# EAGLE board esquema_gps_usb_v2 (EAGLE 5.11)
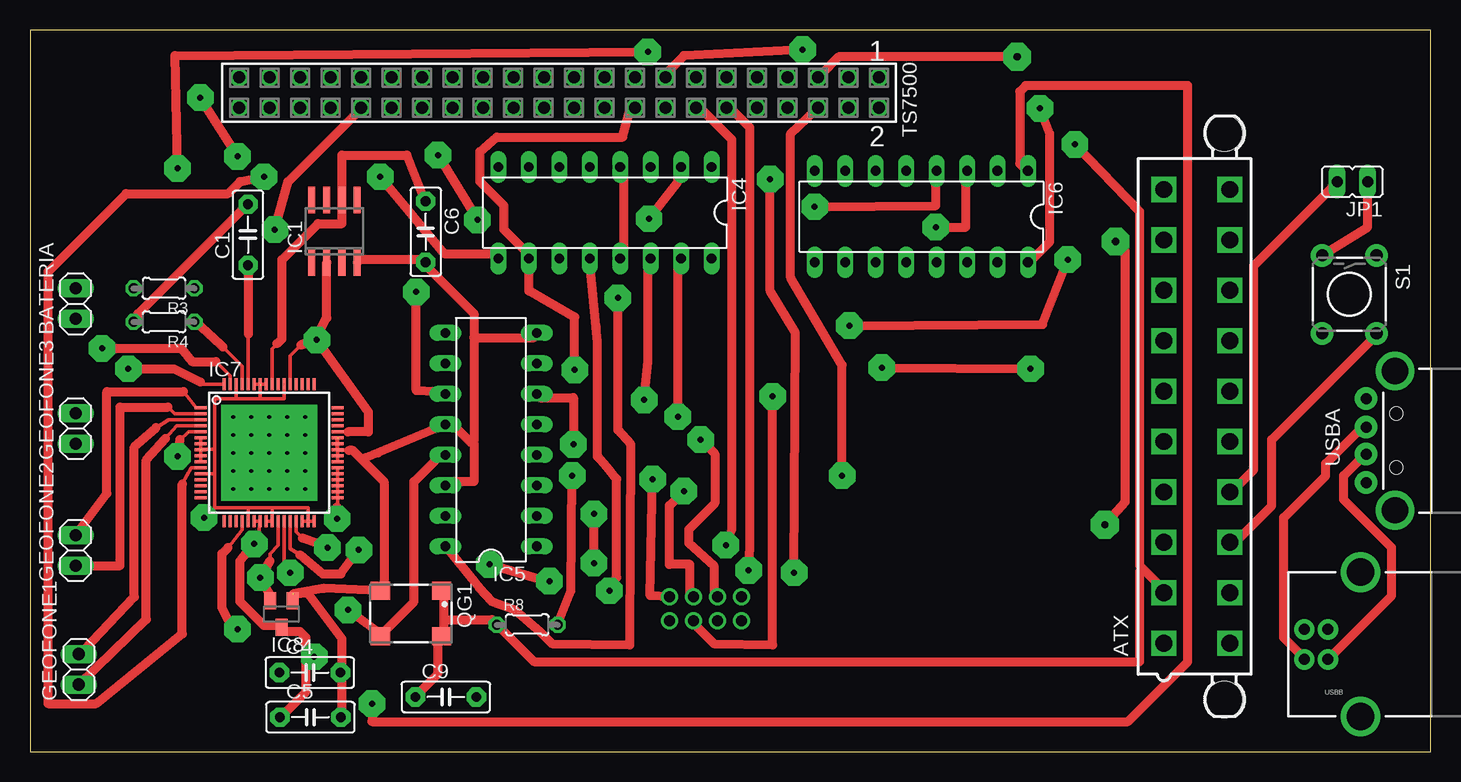
[diagram p0: board, top side]
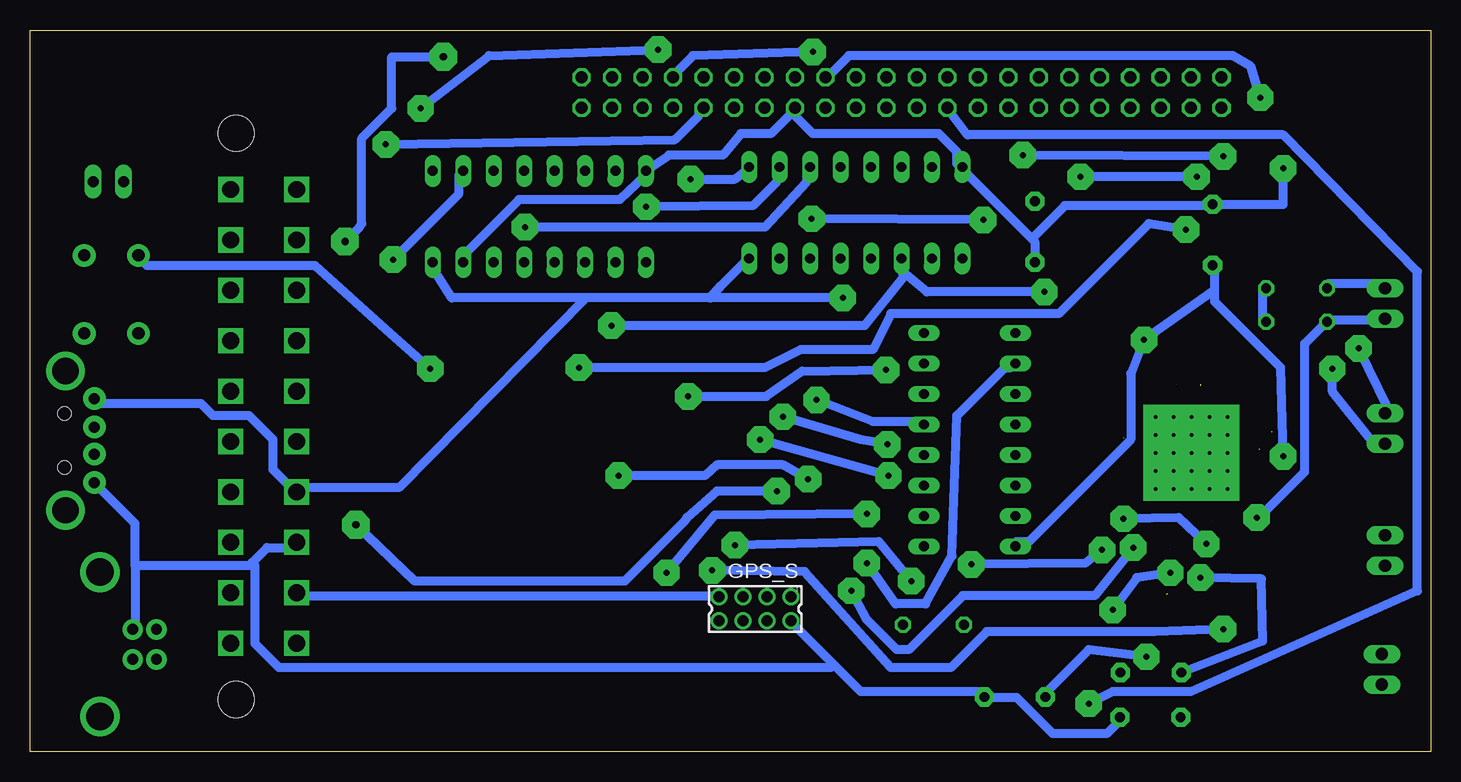
[diagram p1: board, bottom side, seen from below]

Size 116.76 x 60.13 mm. Coordinates in mm from the lower left corner, seen from the top.
Outline: 0,0 116.76,0 116.76,60.13 0,60.13 0,0
Copper layers (1*16): Top 0.035mm / dielectric 1.5mm / Bottom 0.035mm
Design rules "default *": minimum track width 0.75mm, minimum drill 0.5mm, track to track 0.4mm, track to pad 0.4mm, pad to pad 0.4mm, via to via 0.4mm, smd to smd 8mil, copper to edge 40mil, drill to drill 8mil, minimum pad ring 10mil, minimum via ring 0.85mm, stop-mask expansion 0.5mm, vias tented up to drill 0mil, thermal gap 10mil
tKeepout: area 0,26 to 0,26

## Footprints (pad centres in the part's own frame; a part is rotated, then mirrored left to right if it is on the bottom)
5566-20 = drill 1.4 square: 1 18.9,-2.75; 2 14.7,-2.75; 3 10.5,-2.75; 4 6.3,-2.75; 5 2.1,-2.75; 6 -2.1,-2.75; 7 -6.3,-2.75; 8 -10.5,-2.75; 9 -14.7,-2.75; 10 -18.9,-2.75; 11 18.9,2.75; 12 14.7,2.75; 13 10.5,2.75; 14 6.3,2.75; 15 2.1,2.75; 16 -2.1,2.75; 17 -6.3,2.75; 18 -10.5,2.75; 19 -14.7,2.75; 20 -18.9,2.75 | hole 3: 23.6,2.29; -23.6,2.29
1X02 = drill 1.016 long: 1 -1.27,0; 2 1.27,0
C5B2.5 = drill 0.813 pad 1.6 octagon: 1 -2.54,0; 2 2.54,0
87758-0816 = drill 0.9 pad 1.27 round: 1 -3,-1; 2 -3,1; 3 -1,-1; 4 -1,1; 5 1,-1; 6 1,1; 7 3,-1; 8 3,1
SO08 = smd 0.6 x 2.2: 1 -1.905,-2.6; 2 -0.635,-2.6; 3 0.635,-2.6; 4 1.905,-2.6; 5 1.905,2.6; 6 0.635,2.6; 7 -0.635,2.6; 8 -1.905,2.6
DIL16 = drill 0.813 long: 1 -8.89,-3.81; 2 -6.35,-3.81; 3 -3.81,-3.81; 4 -1.27,-3.81; 5 1.27,-3.81; 6 3.81,-3.81; 7 6.35,-3.81; 8 8.89,-3.81; 9 8.89,3.81; 10 6.35,3.81; 11 3.81,3.81; 12 1.27,3.81; 13 -1.27,3.81; 14 -3.81,3.81; 15 -6.35,3.81; 16 -8.89,3.81
HTQFP-64-PAP = smd 1 x 0.25: 1 -5.7,3.75; 2 -5.7,3.25; 3 -5.7,2.75; 4 -5.7,2.25; 5 -5.7,1.75; 6 -5.7,1.25; 7 -5.7,0.75; 8 -5.7,0.25; 9 -5.7,-0.25; 10 -5.7,-0.75; 11 -5.7,-1.25; 12 -5.7,-1.75; 13 -5.7,-2.25; 14 -5.7,-2.75; 15 -5.7,-3.25; 16 -5.7,-3.75; 33 5.7,-3.75; 34 5.7,-3.25; 35 5.7,-2.75; 36 5.7,-2.25; 37 5.7,-1.75; 38 5.7,-1.25; 39 5.7,-0.75; 40 5.7,-0.25; 41 5.7,0.25; 42 5.7,0.75; 43 5.7,1.25; 44 5.7,1.75; 45 5.7,2.25; 46 5.7,2.75; 47 5.7,3.25; 48 5.7,3.75 | smd 0.25 x 1: 17 -3.75,-5.7; 18 -3.25,-5.7; 19 -2.75,-5.7; 20 -2.25,-5.7; 21 -1.75,-5.7; 22 -1.25,-5.7; 23 -0.75,-5.7; 24 -0.25,-5.7; 25 0.25,-5.7; 26 0.75,-5.7; 27 1.25,-5.7; 28 1.75,-5.7; 29 2.25,-5.7; 30 2.75,-5.7; 31 3.25,-5.7; 32 3.75,-5.7; 49 3.75,5.7; 50 3.25,5.7; 51 2.75,5.7; 52 2.25,5.7; 53 1.75,5.7; 54 1.25,5.7; 55 0.75,5.7; 56 0.25,5.7; 57 -0.25,5.7; 58 -0.75,5.7; 59 -1.25,5.7; 60 -1.75,5.7; 61 -2.25,5.7; 62 -2.75,5.7; 63 -3.25,5.7; 64 -3.75,5.7 | drill 0.3 pad 2 square: EXP1 -3,3; EXP2 -1.5,3; EXP3 0,3; EXP4 1.5,3; EXP5 3,3; EXP6 -3,1.5; EXP7 -1.5,1.5; EXP8 0,1.5; EXP9 1.5,1.5; EXP10 3,1.5; EXP11 -3,0; EXP12 -1.5,0; EXP13 0,0; EXP14 1.5,0; EXP15 3,0; EXP16 -3,-1.5; EXP17 -1.5,-1.5; EXP18 0,-1.5; EXP19 1.5,-1.5; EXP20 3,-1.5; EXP21 -3,-3; EXP22 -1.5,-3; EXP23 0,-3; EXP24 1.5,-3; EXP25 3,-3
SOT23 = smd 1 x 1.4: 1 -0.95,-1.1; 2 0.95,-1.1; 3 0,1.1
JP1 = drill 0.914 long: 1 0,-1.27; 2 0,1.27
SM77H = smd 1.6 x 1.5: 1 -2.55,-1.9; 2 2.55,-1.9; 3 2.55,1.9; 4 -2.55,1.9
0204/5 = drill 0.813 octagon: 1 -2.54,0; 2 2.54,0
TACTILE-PTH = drill 1.016 pad 1.88 round: 1 -3.251,2.261; 2 3.251,2.261; 3 -3.251,-2.261; 4 3.251,-2.261
SSW-122-02-S-D = drill 1 pad 1.5 octagon: 1 -26.67,-1.27; 2 -26.67,1.27; 3 -24.13,-1.27; 4 -24.13,1.27; 5 -21.59,-1.27; 6 -21.59,1.27; 7 -19.05,-1.27; 8 -19.05,1.27; 9 -16.51,-1.27; 10 -16.51,1.27; 11 -13.97,-1.27; 12 -13.97,1.27; 13 -11.43,-1.27; 14 -11.43,1.27; 15 -8.89,-1.27; 16 -8.89,1.27; 17 -6.35,-1.27; 18 -6.35,1.27; 19 -3.81,-1.27; 20 -3.81,1.27; 21 -1.27,-1.27; 22 -1.27,1.27; 23 1.27,-1.27; 24 1.27,1.27; 25 3.81,-1.27; 26 3.81,1.27; 27 6.35,-1.27; 28 6.35,1.27; 29 8.89,-1.27; 30 8.89,1.27; 31 11.43,-1.27; 32 11.43,1.27; 33 13.97,-1.27; 34 13.97,1.27; 35 16.51,-1.27; 36 16.51,1.27; 37 19.05,-1.27; 38 19.05,1.27; 39 21.59,-1.27; 40 21.59,1.27; 41 24.13,-1.27; 42 24.13,1.27; 43 26.67,-1.27; 44 26.67,1.27
USB-A-H = drill 0.914 pad 1.88 round: D+ 2.4,1.127; D- 2.4,-1.127; GND 2.4,3.5; VBUS 2.4,-3.5 | drill 2.2 round: GND2 0,-5.8; GND3 0,5.8 | hole 1.1: -0.1,2.25; -0.1,-2.25
USB-B-PTH = drill 0.914 pad 1.676 round: D+ 0,1.25; D- 1.981,1.25; GND 0,-1.25; VBUS 1.981,-1.25 | drill 2.286 round: S1 -2.718,-6.02; S2 -2.718,6.02

## Placement (x,y rotation side)
ATX  5566-20  [5566-20]  97.28,27.94 270 top
BATERIA  [1X02]  3.81,37.34 90 top
C1  1uF  [C5B2.5]  18.18,43.07 90 top
C4  10uF  [C5B2.5]  23.33,6.59 0 top
C5  10uF  [C5B2.5]  23.38,2.86 0 top
C6  10uF  [C5B2.5]  32.98,43.32 270 top
C9  0.1uF  [C5B2.5]  34.67,4.55 0 top
GEOFONE1  [1X02]  4.06,6.86 90 top
GEOFONE2  [1X02]  3.81,16.76 90 top
GEOFONE3  [1X02]  3.81,26.92 90 top
GPS_S  87758-0816  [87758-0816]  56.32,11.9 180 bottom
IC1  REF02D  [SO08]  25.37,43.36 0 top
IC4  4572N  [DIL16]  47.93,44.91 180 top
IC5  74AC590N  [DIL16]  38.43,25.99 90 top
IC6  74LS157N  [DIL16]  74.31,44.58 180 top
IC7  ADS1278  [HTQFP-64-PAP]  19.94,24.89 0 top
IC8  [SOT23]  20.96,11.47 180 top
JP1  [JP1]  110.24,47.5 90 top
QG1  SM77H  [SM77H]  31.76,11.51 180 top
R3  5k  [0204/5]  11.18,38.61 180 top
R4  1k  [0204/5]  11.18,35.81 180 top
R8  100k  [0204/5]  41.45,10.57 0 top
S1  [TACTILE-PTH]  109.98,38.1 270 top
TS7500  SSW-122-02-S-D  [SSW-122-02-S-D]  44.1,54.91 180 top
USBA  USB-A-H  [USB-A-H]  113.79,25.91 180 top
USBB  USBPTH  [USB-B-PTH]  108.2,8.93 180 top

## Library data of the parts
ATX = con-molex; OC_FARNELL: unknown; OC_NEWARK: unknown
BATERIA GEOFONE1-GEOFONE3 = pinhead
C1 C4-C6 C9 = capacitor-wima
GPS_S = con-molex; MF: MOLEX; MPN: 87758-0816; OC_FARNELL: 7472331; OC_NEWARK: 59J1556
IC1 = linear
IC4 = 45xx
IC5 IC6 = 74xx-eu
IC7 = texas; MPN: ADS1278IPAPT; OC_FARNELL: 1603419; OC_NEWARK: 50M8811
IC8 = v-reg
JP1 = jumper
QG1 = crystal; OC_FARNELL: unknown; OC_NEWARK: unknown
R3 R4 = rcl
R8 = resistor
S1 USBA USBB = SparkFun
TS7500 = con-samtec; MPN: SSW-122-02-S-D; OC_FARNELL: unknown; OC_NEWARK: 11P9673

## Nets
2.5V: C6.1 IC1.6 IC7.56
+1V8: C4.1 IC7.26 IC8.2
+3V3: ATX.2 C5.1 C9.1 GPS_S.7 IC7.22 IC7.23 IC7.33 IC7.34 IC7.35 IC7.36 IC7.37 IC7.38 IC8.3 QG1.1 QG1.4 R8.1 TS7500.10
+5V: ATX.4 C1.1 IC1.2 IC4.16 IC5.16 IC6.16 IC7.5 IC7.44 IC7.53 IC7.60 TS7500.15 USBA.VBUS
ADC_DATA: IC7.20 TS7500.12
CONT_144: IC4.3 IC6.3
CONT_RST: IC4.1 IC5.10
DR_INT: IC4.2 IC6.4 TS7500.17
FIRST_ADC_INT: IC4.11 IC5.11 IC6.2
GND: ATX.3 BATERIA.1 C1.2 C4.2 C5.2 C6.2 C9.2 GPS_S.2 IC1.4 IC4.8 IC5.8 IC5.12 IC5.14 IC6.8 IC6.15 IC7.6 IC7.7 IC7.8 IC7.9 IC7.10 IC7.12 IC7.21 IC7.24 IC7.25 IC7.30 IC7.31 IC7.32 IC7.39 IC7.40 IC7.41 IC7.42 IC7.43 IC7.54 IC7.57 IC7.58 IC7.59 IC7.62 IC8.1 QG1.2 R4.2 TS7500.7 TS7500.16 USBA.GND USBB.GND
GPS_PPS: GPS_S.4 IC4.10 TS7500.18
N$1: IC6.1 TS7500.26
N$2: IC4.15 IC5.6
N$3: IC4.14 IC5.5
N$4: IC4.9 IC7.11
N$5: IC4.4 IC4.13
N$6: JP1.1 S1.3 TS7500.36
N$7: IC4.12 IC7.29
N$8: GEOFONE1.2 IC7.3
N$9: ATX.13 S1.2
N$10: GEOFONE1.1 IC7.4
N$11: GEOFONE2.2 IC7.1
N$12: IC7.61 R3.1 R4.1
N$13: USBA.D- USBB.D-
N$14: GEOFONE3.2 IC7.63
N$15: GEOFONE3.1 IC7.64
N$17: IC5.13 IC7.27 QG1.3
N$18: USBA.D+ USBB.D+
N$19: BATERIA.2 R3.2
N$23: ATX.14 JP1.2
N$42: GPS_S.1 TS7500.6
N$43: GPS_S.3 TS7500.5
N$44: GPS_S.5 R8.2
N$46: GEOFONE2.1 IC7.2
SPI_CLOCK: IC7.28 TS7500.14

## Tracks (layer width: path | path; a pad name or v marks a point on that pad's centre or on a via)
2.5V
  Top 0.3: IC7.56 20.19,33.59 20.6,34
  Top 0.75: 20.6,34 21,34.4 21,41 24,44 26,44 26,45.5 IC1.6 26,46 26,49.7 31.4,49.7 32.8,46.1 C6.1
+1V8  (via drill 0.5)
  Top 0.3: 20.2,15.8 20.1,15.8 20.1,15.7 20,15.8 20,15.9 20,16.5 20.69,17.19 IC7.26
  Top 0.75: 20,15.9 v19.2,14.5 20,13 IC8.2
  Bottom 0.75: v19.2,14.5 14.1,14.4 14,9.2 C4.1
+3V3  (via drill 0.5)
  Top 0.3: IC7.38 IC7.37 IC7.36 IC7.35 IC7.34 IC7.33 25.64,20.46 25.6,20.4 | IC7.22 IC7.23 18.99,17.39 18.5,17.2
  Top 0.75: v25.6,19.4 25.6,20.4 | v18.7,17.3 18.9,17.4 18.9,17.3 18.5,17.2 17.5,15.9 17.5,12.5 19.5,10.5 20.5,10.5 IC8.3 21,10 22.5,10 23,9.5 23,8.5 | 23,8.5 23,5 21,3 C5.1 | 34.5,11 34.5,13 QG1.1 | 34.5,11 34.5,10 QG1.4 34,9.5 34,6.5 32.5,5 C9.1 | 34.5,11 38.5,11 R8.1 39,10.5 42,7.5 92.5,7.5 92.5,15 92.75,15.25 | v87.1,50.6 92.5,45 92.5,15.5 92.75,15.25 | 92.75,15.25 94.5,13.5 ATX.2 | 23,8.5 v23.7,7.9
  Bottom 0.75: v25.6,19.4 21,19.5 v18.7,17.3 | GPS_S.7 59.5,13 94.5,13 ATX.2 | v87.1,50.6 63,51 61,53 61,53.5 TS7500.10 | v23.7,7.9 28.5,8.5 32,5 C9.1
+5V  (via drill 0.5)  (1 unrouted)
  Top 0.3: IC7.5 13.24,26.64 | 12.5,26 13.2,26.6 | IC7.60 18.19,33.99 18.2,34.8 | IC7.53 21.69,32.99 22.6,33.9 | 26.5,26.64 IC7.44
  Top 0.75: 22.6,33.9 23.8,34.3 | v12.3,24.6 12.5,26 | 22.6,33.9 v23.9,34.3 28.2,28.3 28.2,26.64 26.5,26.64 | 18.2,34.8 18.2,40.5 C1.1 | v64.4,58.5 54.5,58 53,56.5 TS7500.15 | v84.2,53.6 85,51.5 85,42.5 83.5,41 IC6.16 | IC5.16 34.8,16.9 37,14.2 37.4,13.7 38.5,12.5 40.4,11.8 42.5,10 43.5,9 50,8.9 50.1,25.6 49,26.8 v49,37.8 | IC1.2 24.74,36.14 23.8,34.4 22.6,33.9
  Bottom 0.75: v12.3,24.6 12.5,32 18,37.5 18,38.5 | 18,38.5 18,40.5 C1.1 | 18,38.5 v23.9,34.3 25,31.5 25,26 33.5,17.5 34.5,17.5 IC5.16 | USBA.VBUS 111,29 102.5,29 101.5,28 98.5,28 96.5,26 96.5,23.5 95,22 ATX.4 94.5,22 86,22 70.4,37.8 | 70.4,37.8 60.1,37.8 59.25,38.75 | 70.4,37.8 81.6,37.8 83,40 83,40.5 IC6.16 | 59.25,38.75 57,41 IC4.16 | v64.4,58.5 78.5,58 v84.2,53.6 | v49,37.8 60,37.8 59.25,38.75
ADC_DATA  (via drill 0.5)
  Top 0.3: IC7.20 17.69,18.49 16.5,17
  Top 0.75: v17.3,10.2 16.5,11 16,12 16,16.5 16.5,17 | v59.9,15.1 60,17 60,52 58.5,53.5 TS7500.12
  Bottom 0.75: v17.3,10.2 23,10 37,10 40,7 45,7 52.2,15 v59.9,15.1
CONT_144  (via drill 0.5)
  Top 0.75: v75.5,43.7 78,43.7 78,48 IC6.3
  Bottom 0.75: v75.5,43.7 55.5,43.7 52,47.5 52,48.5 IC4.3
CONT_RST  (via drill 0.5)
  Top 0.75: v47,15.7 v47,19.8 | v63.7,14.9 63.8,34.9 61.7,38.4 v61.7,47.7
  Bottom 0.75: v47,15.7 44.6,12.3 42.1,12.3 39.9,16.3 39.5,28 35.5,32 35,32 IC5.10 | v47,19.8 59.7,19.7 v63.7,14.9 | v61.7,47.7 58,47.7 57,48.5 IC4.1
DR_INT  (via drill 0.5)
  Top 0.75: v65.4,45.4 75.5,45.5 75.5,48 IC6.4 | v17.3,49.6 v14.2,54.5 | v34,49.7 v37.3,44.3 | v51.6,44.4 54,47.5 54,48.5 IC4.2
  Bottom 0.75: v65.4,45.4 56.5,45.5 54.5,47.5 54.5,48.5 IC4.2 | v14.2,54.5 15,57.1 16.5,58 48.5,58 50,56.5 TS7500.17 | v17.3,49.6 v34,49.7 | v37.3,44.3 v51.6,44.4
FIRST_ADC_INT  (via drill 0.5)
  Top 0.75: v32.2,38.3 32.2,30.1 34.5,30 IC5.11 | v86.5,41 84.4,35.6 v68.3,35.5
  Bottom 0.75: v32.2,38.3 42,38.3 44,40 44,41 IC4.11 44,39.5 47.2,35.5 v68.3,35.5 | v86.5,41 81,46.5 81,48 IC6.2
GND  (via drill 0.5)  (8 unrouted)
  Top 0.3: IC7.6 IC7.7 IC7.8 IC7.9 IC7.10 | IC7.32 IC7.31 23.2,20.3 20.2,20.3 | IC7.30 IC7.31 | IC7.59 IC7.58 IC7.57 | 15.4,23.14 IC7.12 | 15.4,23.14 15.4,25.2 | 15.4,25.2 14.3,25.2 | 17.19,29.4 IC7.62 | 17.19,29.4 19.2,29.4 | 19.2,29.4 19.2,30.5 | 19.2,29.4 21.2,29.4 IC7.54 | 17.19,29.4 15.4,29.4 15.4,25.2 | IC7.39 IC7.40 25.64,25.06 25.6,25.1 | IC7.42 IC7.41 | 25.64,25.1 IC7.42 | 25.64,25.1 25.6,25.1 | IC7.42 25.64,26.1 25.6,26.1 25.6,25.1 | 26.6,25.1 25.64,25.1 | 20.19,20.3 IC7.25 IC7.24 IC7.25 20.2,20.3 | 20.19,20.3 20.2,20.3 | 18.2,20.3 20.19,20.3 | 15.4,20.3 15.4,23.14 | 15.4,20.3 18.2,20.3 | v14.49,19.51 15.4,20.3 | 18.2,20.3 IC7.21
  Top 0.75: 26.6,25.1 26.9,25.1 27.75,24.25 | C1.2 18,45.5 9,36.5 9,36 R4.2 | v51.5,58.3 12.1,58 v12.3,48.6 | v14.5,19.5 v14.49,19.51 | IC1.4 27.5,41 32.5,41 C6.2 33,40.5 37,36.5 37,34.5 | 36.75,25.75 35,27.5 IC5.12 34.5,27.2 29,24.9 28,24.5 27.75,24.25 | 36.75,25.75 37,25.7 37,22.5 35,22.5 IC5.14 | 37,34.5 42,34.5 IC5.8 | 37,34.5 37,25.9 36.75,25.75 | C5.2 26,3 26,6.5 C4.2 26,7 26,9.4 23.2,13.2 22,13.1 | IC8.1 21.9,13.1 | 27.75,24.25 29.5,22.5 29.5,13.5 QG1.2 29.1,13.4 24.5,13.6 21.95,13.15
  Bottom 0.75: BATERIA.1 4,36 8.5,36 R4.2 9,35.5 10.5,34 10.5,23.3 14.5,19.3 v14.5,19.5 | v51.5,58.3 61.5,58 63,56.5 TS7500.7 | v12.3,48.6 12.3,45.6 18,45.6 C1.2 18.5,45.5 30.5,45.5 33.25,42.75 | IC6.15 80.5,41 80.5,41.5 76,46 67.6,46 65.5,48 IC6.8 63.5,49.7 59,49.7 57.5,51.5 55,51.5 53,53.5 TS7500.16 53,53 51.5,51.5 41,51.5 39.5,50 39.5,49 IC4.8 39,48.5 33.25,42.75 | 33.25,42.75 33,42.5 33,41 C6.2 | 108,15.5 108,19 111,22 USBA.GND | 108,15.5 108,10.5 USBB.GND | 98.25,15.75 98.5,15.5 108,15.5 | 98.25,15.75 97,17 95,17 ATX.3 | 49.75,7.25 53,10.5 GPS_S.2 | 49.75,7.25 47.5,5 37.5,5 C9.2 37,4.5 34.5,4.5 31.5,1.5 27,1.5 26,2.5 C5.2 | 98.25,15.75 98,15.5 98,9 96,7 50,7 49.75,7.25
GPS_PPS  (via drill 0.5)
  Top 0.75: TS7500.18 50,53.5 49.4,51.2 38.9,51.2 37.5,50 37.5,47.5 39.5,45.5 39.5,43.5 41.5,41.5 IC4.10 41.6,40.9 41.6,38.4 45.4,36.2 v45.4,31.8 | v61.9,29.6 61.9,8.9 57,9 55.5,10.5 GPS_S.4
  Bottom 0.75: v61.9,29.6 55.4,29.6 52.4,31.7 v45.4,31.8
N$1  (via drill 0.5)
  Top 0.75: v28.5,4 28.5,2.5 91.5,2.5 96.5,7.5 96.5,55.5 83,55.5 82.5,55 82.5,49 83,48.5 IC6.1
  Bottom 0.75: v28.5,4 26.5,5 20,5 1.1,13.4 1.1,40 12.3,51.4 38.6,51.4 40.2,53.5 TS7500.26
N$2  (via drill 0.5)
  Top 0.75: v45.3,25.6 45.3,29.5 42.5,29.5 IC5.6 | v54,27.9 54,41 IC4.15
  Bottom 0.75: v45.3,25.6 47.5,26 v54,27.9
N$3  (via drill 0.5)
  Top 0.75: v51.2,29.3 51.5,32.5 51.5,41 IC4.14
  Bottom 0.75: v51.2,29.3 46.5,27.5 42.5,27.5 IC5.5
N$4  (via drill 0.5)
  Top 0.3: IC7.11 13.44,23.64 12.7,22.3
  Top 0.75: 12.7,22.3 12.7,9.8 5.5,4 1.5,4 1.5,40 8,46.5 16.5,46.5 17.5,47.5 19.4,47.9 v19.5,47.9 | v29.2,47.9 34.5,41.5 39,41.5 IC4.9
  Bottom 0.75: v19.5,47.9 v29.2,47.9
N$5
  Top 0.75: IC4.13 49.5,41.5 49.5,48.5 IC4.4
N$6  (via drill 0.5)
  Top 0.75: JP1.1 111.5,47.2 111.5,43.7 S1.3 | v20.4,43.5 21.5,47.5 27.5,53.5 TS7500.36 | v71,32 v83.4,31.9
  Bottom 0.75: v20.4,43.5 23.5,44 31,36.5 45,36.5 46.5,33.5 52.5,33.5 55.5,32 v71,32 | v83.4,31.9 86.7,34.8 93,40.5 107,40.5 107.5,41 S1.3
N$7  (via drill 0.5)
  Top 0.3: 22.19,18.41 IC7.29 22.19,18.31 22.7,17.8
  Top 0.75: 22.7,17.8 24.6,17.1 v24.8,17 | IC4.12 46.7,40.6 47.2,35.4 47.3,34.1 47.3,24.6 48.1,23.7 48.9,22.7 48.9,14.5 v48.3,13.4
  Bottom 0.75: v24.8,17 28,13 39,13 43.5,8.5 44.5,8.5 47,11 v48.3,13.4
N$8
  Top 0.3: IC7.3 11.54,27.64 10.5,27
  Top 0.75: 10.5,27 8.7,25.4 8.7,12.9 4.5,8.5 GEOFONE1.2
N$9
  Top 0.75: S1.2 112,34.5 103.5,26 103.5,20.5 100.5,17.5 ATX.13
N$10
  Top 0.3: IC7.4 12.24,27.14 11.3,26.1
  Top 0.75: 11.3,26.1 9.7,24.3 9.7,11.02 GEOFONE1.1
N$11
  Top 0.3: IC7.1 13.86,28.64 12.8,30
  Top 0.75: 12.8,30 6.4,30 6.4,21.5 GEOFONE2.2
N$12
  Top 0.3: IC7.61 17.69,32.11 16.1,33.7
  Top 0.75: 16.1,33.7 15.9,33.9 13.8,35.8 R4.1
  Bottom 0.75: R3.1 14,38.5 14,36 R4.1
N$13
  Top 0.75: USBB.D- 106,8 104.5,9.5 104.5,19.5 108,23 108,24 111,27 USBA.D-
N$14  (via drill 0.5)
  Top 0.3: IC7.63 16.69,31.31 15.5,32.5
  Top 0.75: 15.5,32.5 13.5,32.5 12.6,33.6 v6,33.6
  Bottom 0.75: v6,33.6 3.5,28.5 GEOFONE3.2
N$15  (via drill 0.5)
  Top 0.3: IC7.64 14.41,30.59 14.2,30.8
  Top 0.75: 14.2,30.8 12,31.9 v8.2,31.9
  Bottom 0.75: v8.2,31.9 8.2,30 5,26 4,26 GEOFONE3.1
N$17  (via drill 0.5)
  Top 0.3: IC7.27 21.19,15.51 21.9,14.6
  Top 0.75: IC5.13 34.5,25 32,22.5 32,12.5 29.5,10 QG1.3 29,10 v26.5,11.8 | v21.7,14.9 21.9,14.6
  Bottom 0.75: v21.7,14.9 24.5,14.5 v26.5,11.8
N$18
  Top 0.75: USBB.D+ 108.5,8 113.5,13 113.5,17 109.5,21 109.5,23 111,24.5 USBA.D+
N$19
  Bottom 0.75: R3.2 8.5,39 4,39 BATERIA.2
N$23
  Top 0.75: JP1.2 108.5,47 102,40.5 102,23.5 100.5,22 ATX.14
N$42  (via drill 0.5)
  Top 0.75: v51.9,22.7 51.7,13 GPS_S.1 | v67.7,23 67.7,32.2 63.4,39.5 63.4,51.5 65.5,53.5 TS7500.6
  Bottom 0.75: v51.9,22.7 54,23.9 59.5,23.9 60.5,23 v67.7,23
N$43  (via drill 0.5, 0.6)
  Top 0.75: GPS_S.3 55,13 55,15.6 53.3,15.6 53.3,20.5 v54.5,21.7 | TS7500.5 66,56.5 67.4,57.9 v82.3,57.9 | v90.5,42.5 91.3,41.7 91.3,20.8 v89.6,18.9
  Bottom 0.75: v54.5,21.7 59.5,21.7 62,19.5 62.2,19.2 67.2,14.2 84.7,14.2 v89.6,18.9 | v90.5,42.5 89.3,43.7 89.1,44 89.1,51.1 86.6,53.6 86.6,57.9 v82.3,57.9
N$44  (via drill 0.5)
  Top 0.75: v45.2,23 45.1,13.4 44.1,10.9 R8.2 | v55.9,26 57.1,24.8 57.1,20.7 54.9,18.5 54.9,17.4 57,15.5 57,13 GPS_S.5
  Bottom 0.75: v45.2,23 v55.9,26
N$46
  Top 0.3: 12.04,28.14 IC7.2 | 12.04,28.14 11.5,28.7 12.04,28.16 12.04,28.14
  Top 0.75: 11.5,28.7 7.5,28.7 7.5,15.5 GEOFONE2.1
SPI_CLOCK  (via drill 0.5)  (1 unrouted)
  Top 0.3: 21.69,17.11 IC7.28 21.69,16.91 | 21.7,16.9 22.5,16.4
  Top 0.75: v27.4,16.8 25.9,14.8 24.4,14.8 22.5,16.4 | v38.3,15.6 42.7,14.3 v43.3,14.2 | v58,17.2 58.5,18.5 58.5,51 56,53.5 TS7500.14
  Bottom 0.75: v43.3,14.2 46,17.5 v58,17.2 | v27.4,16.8 28.8,15.7 v38.3,15.6